# Altium PCB boost pcb.PcbDoc
Units mil, origin at the board's own origin, x right, y up, seen from the top; angles counter-clockwise.
Board outline 2540 x 910 mil, 2 copper layers (Top Layer, Bottom Layer); 10 components, 6 nets, 20 pads, 0 vias.
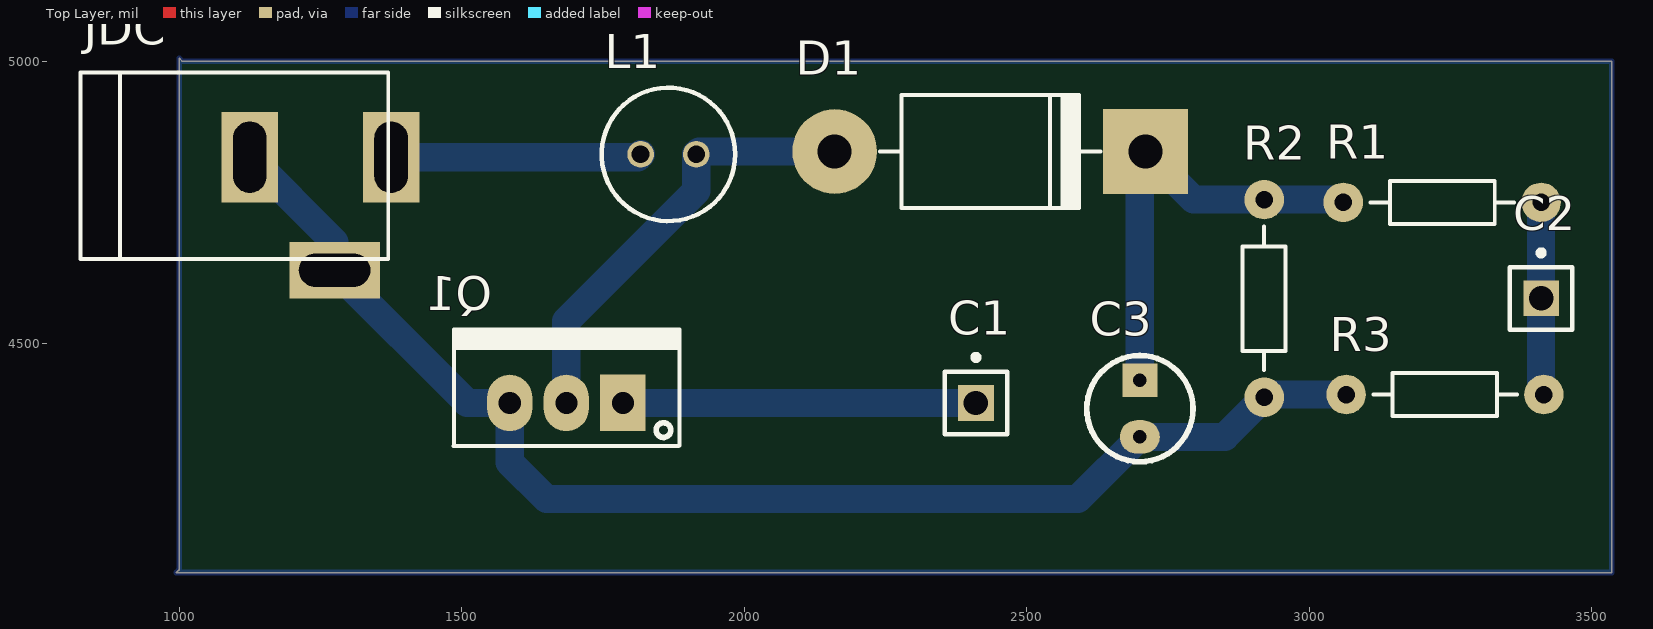
[diagram p0: Top Layer view]
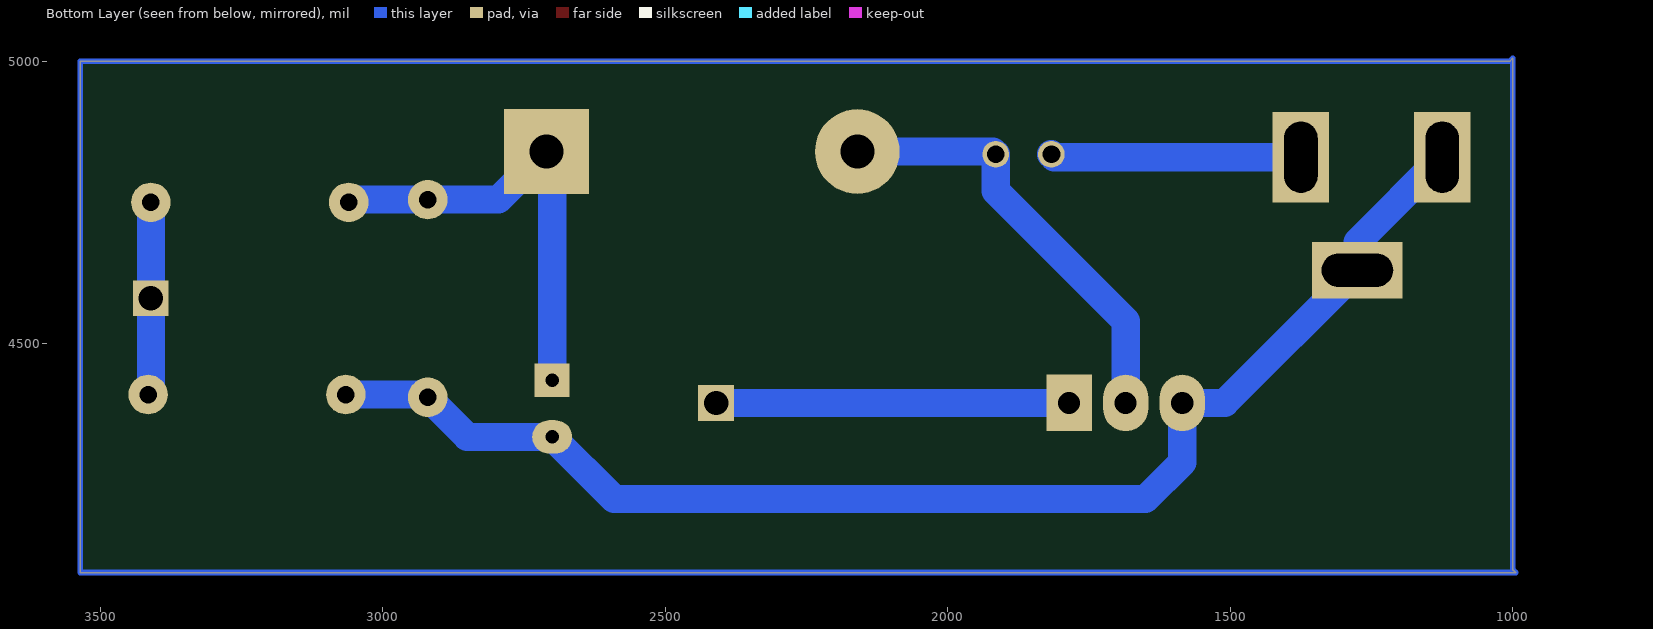
[diagram p1: Bottom Layer view, seen from below]
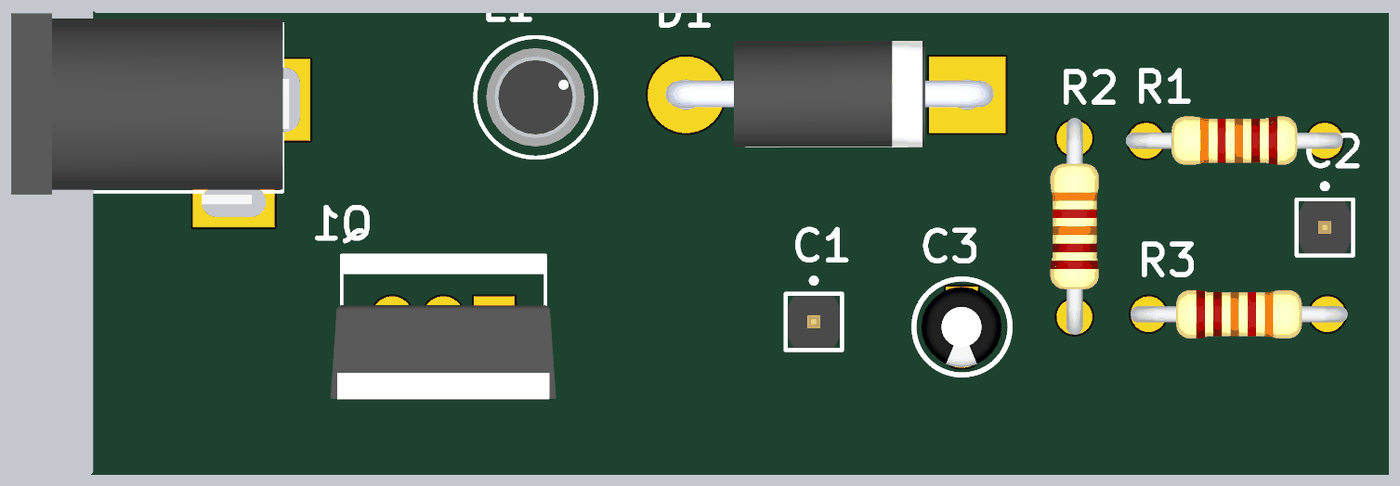
[diagram p2: 3D render of the assembled board from above, using the file's embedded part models]

## Layer stack, top to bottom
Top Solder: solder mask 0.4, Solder Resist, Dk 3.5
Top Layer: signal copper 1.4
Dielectric 1: dielectric 12.6, FR-4, Dk 4.8
Bottom Layer: signal copper 1.4
Bottom Solder: solder mask 0.4, Solder Resist, Dk 3.5

## Board outline
995,4095 1000,4100 1000,5005 1005,5000 3535,5000 3535,4095

## Design rules (kind name [scope] priority, off if disabled: settings)
Clearance [All] p1: gap=20 ignorepadtopadclearanceinfootprint=FALSE
PolygonConnect [All] p1: connectstyle=Relief reliefconductorwidth=10 reliefentries=4 polygonreliefangle="90 Angle" airgapwidth=10
RoutingLayers [All] p1: top layer_v5=FALSE bottom layer_v5=TRUE
RoutingVias [All] p1: holewidth=28 width=50 viastyle="Through Hole" minholewidth=28 minwidth=50 maxholewidth=28 maxwidth=50
SolderMaskExpansion [All] p1: expansion=4
Width [All] p1: maxlimit=60 minlimit=50 preferedwidth=50
29 further rules are at their usual default settings.

## Components (designator, comment, footprint, x,y, rotation, side; value= is the part's Value field where it differs from the comment)
C1 "JP1" JP1-D1T 2410,4395 r0 top
C2 "JP1" JP1-D1T 3410,4580 r0 top
C3 "CN-ALU-DIP" CA-ALU-2.54 2700,4385 r270 top value=104
D1 "1N5408" D5A 2710,4840 r180 top
JDC "Jac DC" DC-IN 1250,4730 r0 top
L1 "L-DIP-1" L-DIP-M-5.3 1865.79,4835 r0 top value="150 mH"
Q1 "IRF840" QTO-220 1785,4395 r180 top
R1 "1k" R1/4W 3060,4750 r0 top value="R1/4W - 1K"
R2 "1k" R1/4W 2920,4755 r270 top value="R1/4W - 1K"
R3 "1k" R1/4W 3415,4410 r180 top value="R1/4W - 1K"

## Footprints (in the part's own frame and the unit in brackets; to place one, negate y for a bottom-side part, rotate by r counter-clockwise, add the part's x,y. Pads: shape width x height; smd on the part's side, far side on the other; paste and mask are expansions set on the pad)
CA-ALU-2.54 [mm]
  rect 1.5x1.58 hole 0.6: 1(-1.27,0)
  oval 1.5x1.8 hole 0.6: 2(1.27,0)
  silkscreen extent -2.39,-2.39 2.39,2.39, body extent -2,-2.03 1.99,1.97, height 7.01
D5A [mil] "Diode 5A, W 200mil, L 550mil"
  round 150 hole 60: 1(550,0)
  rect 150x150 hole 60: 2(0,0)
  silkscreen extent 80,-100 470,100, body extent -52,-106 590,103, height 254
DC-IN [mil] "Jac DC input"
  rect 100x160 hole 59.06 slot 125.98 at 90 deg: 1(125,100) 2(-125,100)
  rect 160x100 hole 59.06 slot 125.98 at 0 deg: 3(25,-100)
  silkscreen extent -425,-80 120,250, body extent -410,-105 134,269, height 434
JP1-D1T [mm] "1pins, 1 row, straight, gold plating"
  rect 1.6x1.6 hole 1.1: 1(0,0)
  silkscreen extent -1.4,-1.4 1.4,2.17, body extent -1.27,-1.27 1.27,1.27, height 8.54
L-DIP-M-5.3 [mm] "THT Inductor, 2-Leads, Body 5.3  mm"
  round 1.2 hole 0.8: 1(-1.25,0) 2(1.25,0)
  silkscreen extent -3,-3 3,3, body extent -2.44,-2.44 2.44,2.45, height 7.6
QTO-220 [mil] "TO-220 - 1-2-3"
  rect 80x100 hole 39: 1(0,0)
  oval 80x100 hole 39: 2(100,0) 3(200,0)
  silkscreen extent -100,-130 300,76, body extent -121,-33 321,152, height 755
R1/4W [mil] "R 1/4W, 2 Pin, 350mil"
  round 70 hole 31: 1(0,0) 2(350,0)
  silkscreen extent 48,-38 302,38, body extent -40,-47 386,47, height 111

## Part data
C1 C2: "WR-PHD 2.54 mm Angled Socket Header", Manufacturer="Würth Elektronik eiSos GmbH", partNo=613002143121, ComponentLink1 Description=Manufacturer, ComponentLink1URL=http://www.we-online.com, ComponentLink2 Description=Datasheet, ComponentLink2URL=http://katalog.we-online.de/em/datasheet/6130xx143121.pdf, Created by="Karrer Zheng", Created Date="29 March 2013", NoPins=02
C3: "Capacitor (Semiconductor SIM Model)", LatestRevisionDate=17-Jul-2002, LatestRevisionNote="Re-released for DXP Platform.", PackageReference=C1206, Publisher="Altium Limited"
D1: library part D5A, "Diode 5A"
JDC: library part DCIN, "Jac DC input"
L1: "Inductor"
Q1: "MOSFET N - CHANNEL 500V - 0.75 - 8A - TO-220"
R1 R2 R3: library part R1/4W, "Resistor 1/4W"

## Nets (pads, with @x,y where several pads share a name; then routed paths per layer and width w, separated by ;. In a path a pad name is that pad's centre, name@x,y a point inside that pad or via, vN(x,y) a via of type N, cw(c..) or ccw(c..) an arc to the next point about the centre after c; other vN are vias at no path point)
GND: C3.2 JDC.2 JDC.3 Q1.3 R2.2 R3.2 | length 2358
  Bottom Layer w50: JDC.2 1275,4680 JDC.3 1510,4395 Q1.3 1585,4290 1650,4225 2590,4225 C3.2 2850,4335 R2.2 2925,4410 R3.2
NetC1_1: C1.1 Q1.1 | length 625
  Bottom Layer w50: Q1.1 C1.1
NetC2_1: C2.1 R1.2 R3.1 | length 342.1
  Bottom Layer w50: R1.2 C2.1 3410,4415 R3.1
NetC3_1: C3.1 D1.2 R1.1 R2.1 | length 796.4
  Bottom Layer w50: C3.1 2700,4830 D1.2 2795,4755 R2.1 3055,4755 R1.1
NetD1_1: D1.1 L1.2 Q1.2 | length 782.3
  Bottom Layer w50: Q1.2 1685,4540 1915,4770 L1.2 1920,4840 D1.1
VCC: JDC.1 L1.1 | length 443.6
  Bottom Layer w50: JDC.1 1811.57,4830 L1.1
copper on no net: | length 6894.1
  Bottom Layer w10: 995,4095 1000,4100 1000,5005 1005,5000 3535,5000 3535,4095 995,4095